# Altium PCB CSI2-NITROGEN_Rev01.PcbDoc
Units mm, origin at the board's own origin, x right, y up, seen from the top; angles counter-clockwise.
Board outline 51 x 29 mm, 4 copper layers (Layer1 Top, Layer2, Layer3, Layer4 Bottom), stack 1.45 mm thick; 29 components, 26 nets, 122 pads, 46 vias.
Unrouted connection lines stored in the file: 15.
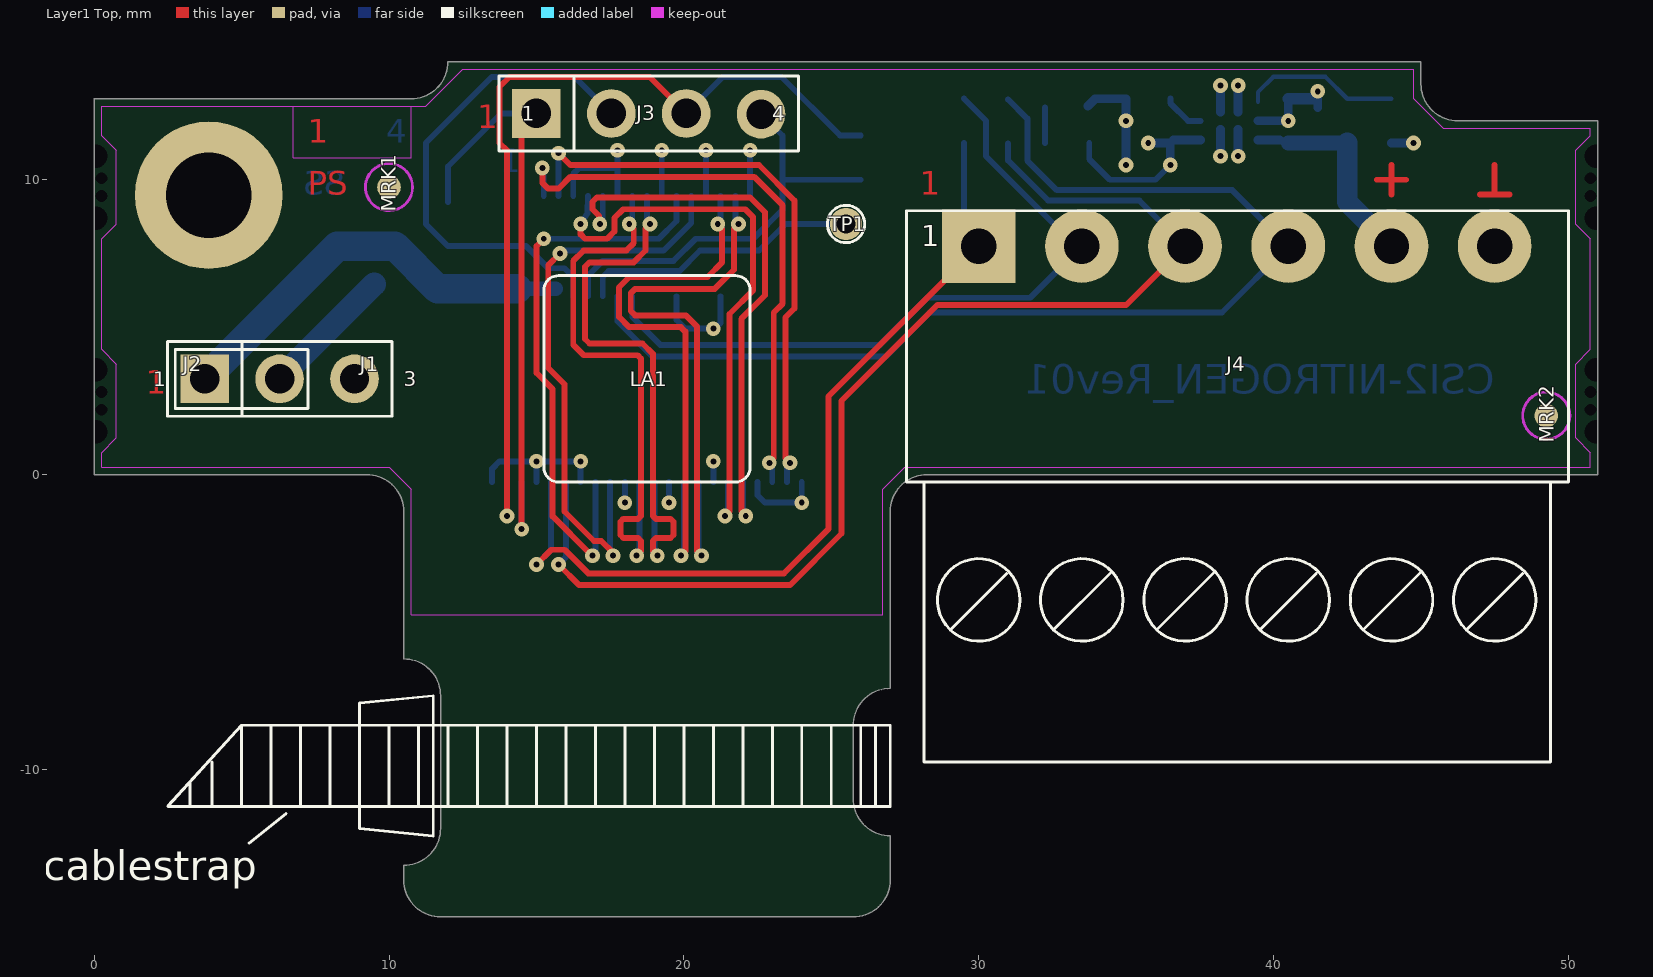
[diagram p0: Layer1 Top view]
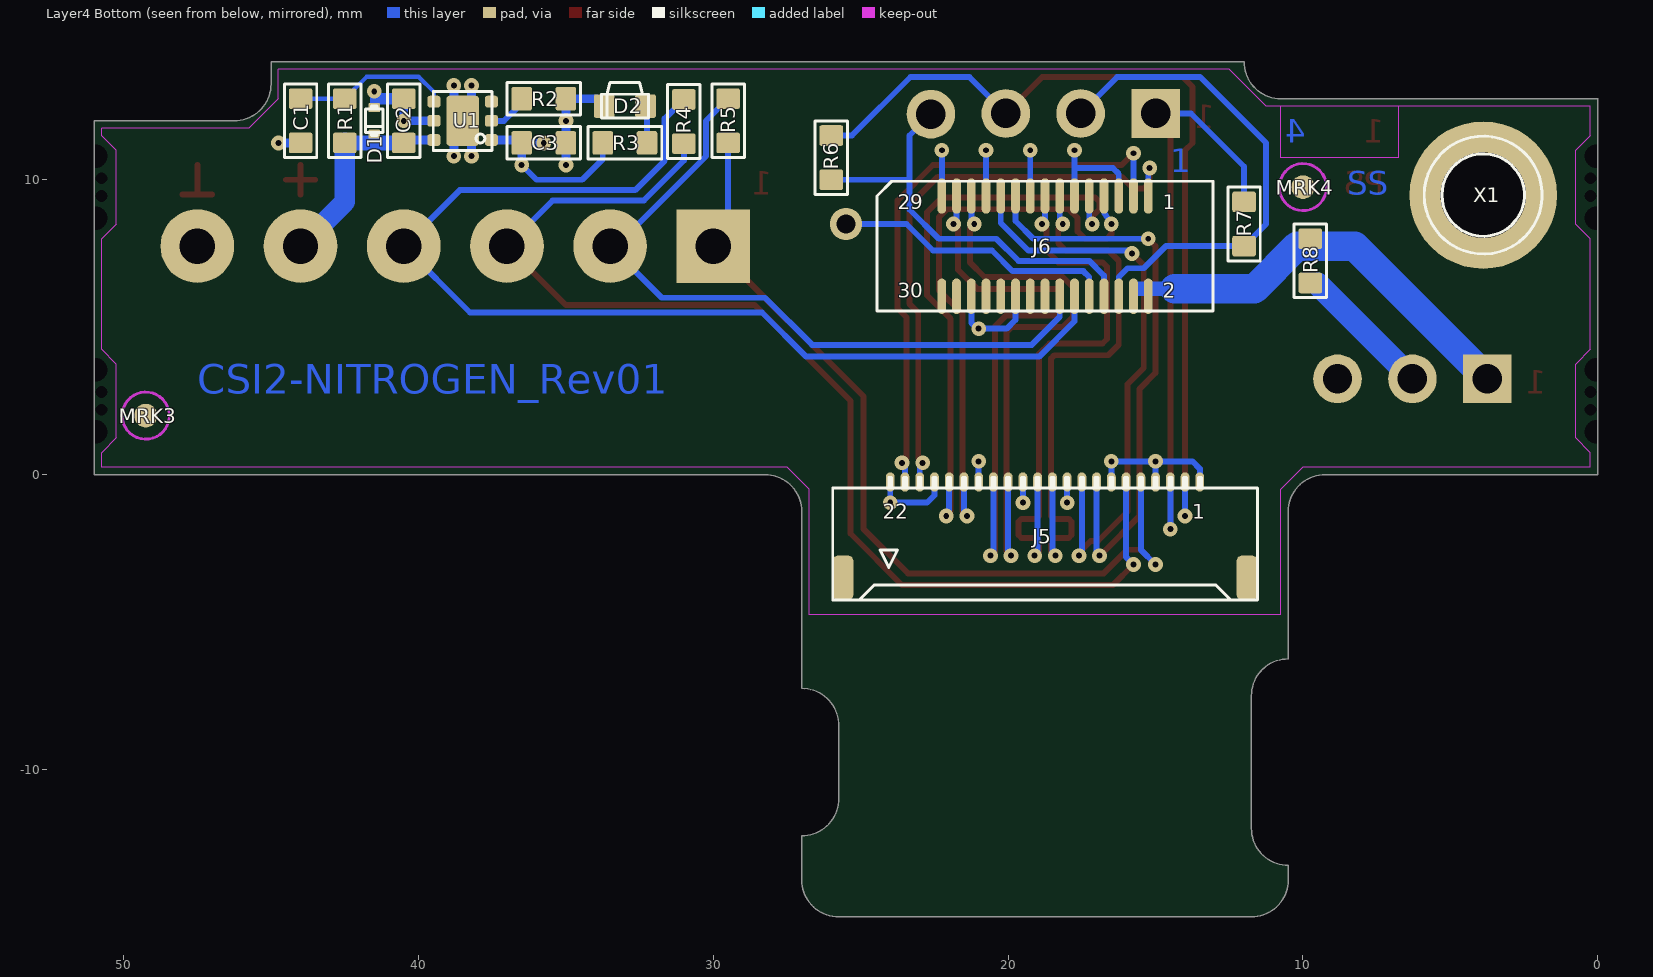
[diagram p1: Layer4 Bottom view, seen from below]
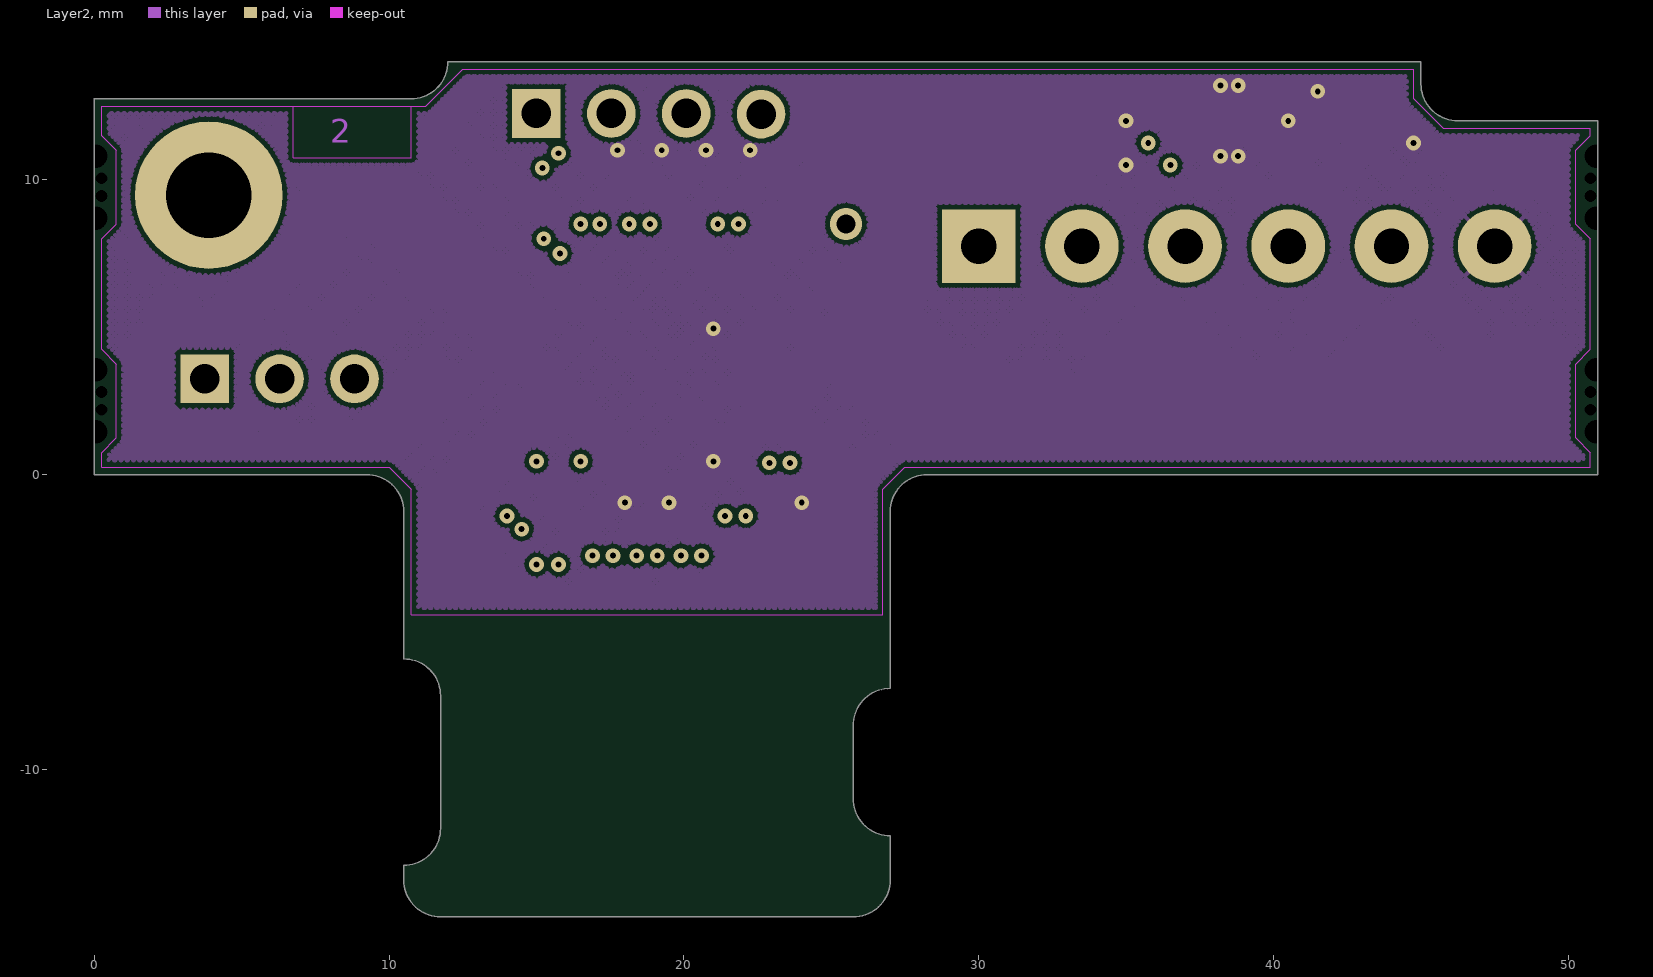
[diagram p2: Layer2]
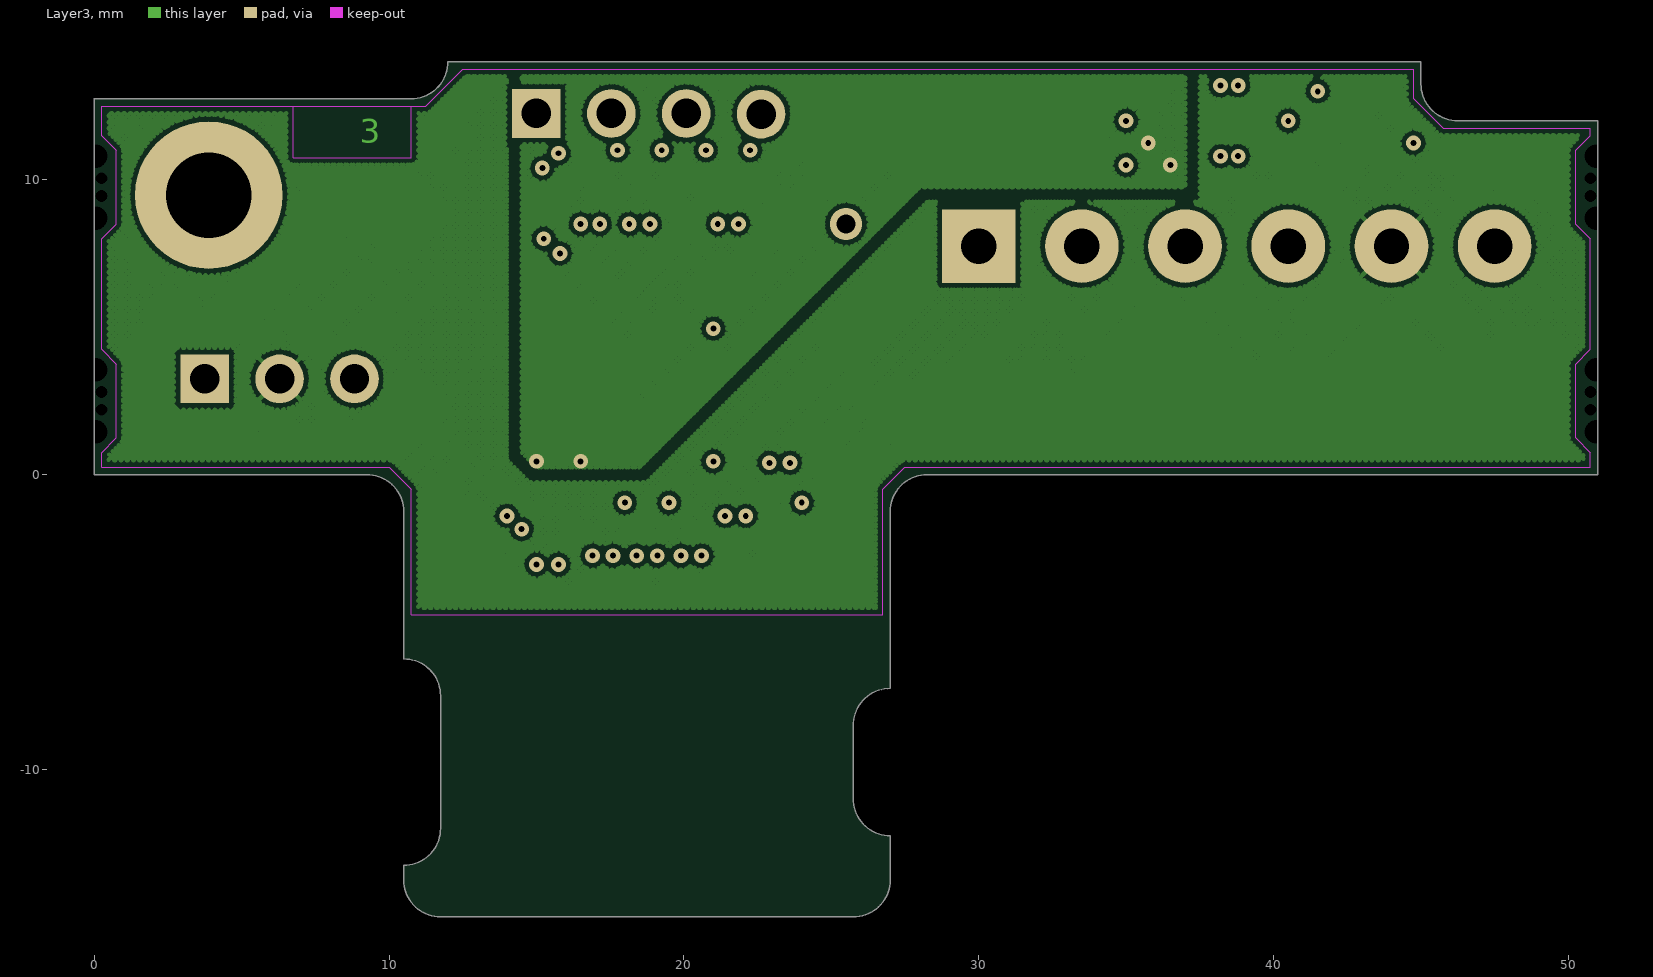
[diagram p3: Layer3]

## Layer stack, top to bottom
Top Solder: solder mask 0.025, Solder Resist, Dk 3.5
Layer1 Top: signal copper 0.035
Dielectric1: prepreg 0.3, FR-4, Dk 4.2
Layer2: signal copper 0.035
Dielectric2: core 0.71, FR-4, Dk 4.2
Layer3: signal copper 0.035
Dielectric3: prepreg 0.3, FR-4, Dk 4.2
Layer4 Bottom: signal copper 0.035
Bottom Solder: solder mask 0.025, Solder Resist, Dk 3.5

## Board outline
10.5,-13.75 10.5,-13.25 ccw(c10.5,-12) 11.75,-12 11.75,-7.5 ccw(c10.5,-7.5) 10.5,-6.25 10.5,-1.25 ccw(c9.25,-1.25) 9.25,0 0,0 0,12.75 10.75,12.75 ccw(c10.75,14) 12,14 45,14 45,13.25 ccw(c46.25,13.25) 46.25,12 51,12 51,0 28.25,0 ccw(c28.25,-1.25) 27,-1.25 27,-7.25 ccw(c27,-8.5) 25.75,-8.5 25.75,-11 ccw(c27,-11) 27,-12.25 27,-13.75 cw(c25.75,-13.75) 25.75,-15 11.75,-15 cw(c11.75,-13.75)

## Design rules (kind name [scope] priority, off if disabled: settings)
Clearance [All] p1: gap=0.15 ignorepadtopadclearanceinfootprint=FALSE except(0: Arc-Hole Track-Hole SMDPad-Hole THPad-Hole Via-Hole Fill-Hole Poly-Hole Region-Hole Text-Hole)
ComponentClearance [All] p1 off: gap=0.254 collisioncheckmode=3 verticalgap=0.254 showdistances=FALSE
DiffPairsRouting [All] p1: maxlimit=1 minlimit=0.2 mostfreqgap=0.2 toplayer_minwidth=0.15 toplayer_maxwidth=0.25 toplayer_prefwidth=0.25 midlayer1_minwidth=0.15 midlayer1_maxwidth=0.25 midlayer1_prefwidth=0.25 midlayer2_minwidth=0.15 midlayer2_maxwidth=0.25 midlayer2_prefwidth=0.25 bottomlayer_minwidth=0.15 bottomlayer_maxwidth=0.25 bottomlayer_prefwidth=0.25 maxuncoupledlength=12.7
FabricationTestPointUsage TestPointUsage [All] p1: valid=0 allowmultiple=FALSE
FabricationTestpoint Testpoint [All] p1: side=3 testpointundercomponent=TRUE minsize=1.016 maxsize=2.54 preferedsize=1.524 minholesize=0 maxholesize=1.016 preferedholesize=0.813 testpointgrid=0.025 allowsidetop=TRUE allowsidebottom=TRUE usegrid=TRUE gridtolerance=0
Height [All] p1 off: minheight=0 maxheight=25.4 prefheight=12.7
HoleSize [All] p1: absolutevalues=TRUE maxlimit=5 minlimit=0.025 maxpercent=80.000 minpercent=20.000
PlaneClearance [All] p1: clearance=0.3
PlaneConnect FreePads [(InPadClass('Free-Pads'))   or (isvia)] p1: planeconnectstyle=Direct reliefexpansion=0.508 reliefentries=4 reliefconductorwidth=0.254 reliefairgap=0.254
PlaneConnect [All] p2: planeconnectstyle=Relief reliefexpansion=0.2 reliefentries=4 reliefconductorwidth=0.2 reliefairgap=0.2
PolygonConnect VIA [isvia] p1: connectstyle=Direct reliefconductorwidth=0.2 reliefentries=4 polygonreliefangle="90 Angle" airgapwidth=0.254
PolygonConnect PolygonConnect_1 [All] p2: connectstyle=Relief reliefconductorwidth=0.15 reliefentries=4 polygonreliefangle="45 Angle" airgapwidth=0.15
RoutingVias [All] p1: holewidth=0.2 width=0.5 viastyle="Through Hole" minholewidth=0.2 minwidth=0.5 maxholewidth=0.2 maxwidth=0.5
SilkToSolderMaskClearance SilkscreenOverComponentPads [IsPad] p1: minsilkscreentomaskgap=0.254 clearancetoexposedcopper=TRUE
SolderMaskExpansion SolderMaskExpansion_VIA [(IsVia)] p1: expansion=-9
SolderMaskExpansion [All] p2: expansion=0.05
Width [All] p1: maxlimit=2 minlimit=0.1 preferedwidth=0.15
21 further rules are at their usual default settings.

## Classes and differential pairs
differential pair B7-CSI2-TXD3: +B7-CSI2-TXD3_P -B7-CSI2-TXD3_N
differential pair B7-CSI2-TXD2: +B7-CSI2-TXD2_P -B7-CSI2-TXD2_N
differential pair B7-CSI2-TXD1: +B7-CSI2-TXD1_P -B7-CSI2-TXD1_N
differential pair B7-CSI2-TXD0: +B7-CSI2-TXD0_P -B7-CSI2-TXD0_N
differential pair B7-CSI2-TXC: +B7-CSI2-TXC_P -B7-CSI2-TXC_N

## Components (designator, comment, footprint, x,y, rotation, side; value= is the part's Value field where it differs from the comment)
C1 "100n" C-0603_1.0 44,12 r270 bottom (schematic designator C2)
C2 "10u" C-0603_1.0 40.5,12 r90 bottom (schematic designator C1)
C3 "10u" C-0603_1.0 35.75,11.25 r180 bottom
D1 "ESD9B5.0ST5G" D-SOD923 41.5,12 r270 bottom (schematic designator D4)
D2 "Green" D-0603-SLED 33,12.5 r180 bottom (schematic designator D11)
J1 "CON1x3" "CON 1x3 RM2.54" 3.75,3.25 r0 top
J2 "Jumper" J-JUMPER-2.54 5,3.25 r180 top (schematic designator J10)
J3 "CON1x4" "CON 1x4 RM2.54" 15,12.25 r0 top locked
J4 "MC 1,5/6-G-3,5" "CON_MiniCon 6pol 3mm5" 30,7.75 r0 top locked
J5 "CON FFC22_Inverted" "J-FH55-22S-0.5SH - Inverted Pins" 18.75,-0.25 r180 bottom (schematic designator J2)
J6 "53748-0308" J-MOLEX-53748-0308 18.75,7.75 r180 bottom locked (schematic designator J5)
LA1 "LABEL 7x7mm" "PCB LABEL 7x7" 18.75,3.25 r0 top
MRK1 "Marker Single Layer" PCB_MARKER_PAD_TOP 10,9.75 r0 top
MRK2 "Marker Single Layer" PCB_MARKER_PAD_TOP 49.25,2 r0 top
MRK3 "Marker Single Layer" PCB_MARKER_PAD_TOP 49.25,2 r180 bottom
MRK4 "Marker Single Layer" PCB_MARKER_PAD_TOP 10,9.75 r180 bottom
R1 "11k" R-0603_0.6 42.5,12 r90 bottom (schematic designator R7)
R2 "11k" R-0603_0.6 35.75,12.75 r0 bottom (schematic designator R8)
R3 "1k0" R-0603_0.6 33,11.25 r180 bottom (schematic designator R6)
R4 "NL" R-0603_0.6 31,11.975 r90 bottom (schematic designator R5)
R5 "NL" R-0603_0.6 29.5,12 r90 bottom (schematic designator R4)
R6 "0R0" R-0603_0.6 26,10.75 r270 bottom (schematic designator R2)
R7 "0R0" R-0603_0.6 12,8.5 r270 bottom (schematic designator R3)
R8 "NL" R-0603_0.6 9.75,7.25 r270 bottom (schematic designator R1)
T1 "PCB Text TOP" "PCB TEXTFIELD TOP 2" 3.75,-43.25 r0 top locked
T2 "PCB Text BOT" "PCB TEXTFIELD BOT 2" 3.75,-43.25 r180 bottom locked
TP1 "TP" TP_11_065 25.5,8.5 r0 top
U1 "NCP380HMUAJAATBG" IC-DFN06_2.0x2.0x0.8 38.5,12 r90 bottom
X1 "PCB Spacer M2x3" X-HOLE-2.9-4.0-DK_AH_3.0 3.888,9.482 r180 bottom locked

## Footprints (in the part's own frame and the unit in brackets; to place one, negate y for a bottom-side part, rotate by r counter-clockwise, add the part's x,y. Pads: shape width x height; smd on the part's side, far side on the other; paste and mask are expansions set on the pad)
C-0603_1.0 [mm]
  rrect20% 0.7x0.8 smd: 1(-0.75,0) 2(0.75,0)
  silkscreen extent -1.25,-0.55 1.25,0.55, body extent -0.9,-0.5 0.9,0.5, height 0.99
"CON 1x3 RM2.54" [mm]
  rect 1.65x1.65 hole 1: 1(0,0)
  round 1.65 hole 1: 2(2.54,0) 3(5.08,0)
  silkscreen extent -1.27,-1.27 6.35,1.27
"CON 1x4 RM2.54" [mm] "RM2.54 Connector 1x4"
  rect 1.65x1.65 hole 1: 1(0,0)
  round 1.65 hole 1: 2(2.54,0) 3(5.08,0) 4(7.62,-0.025)
  silkscreen extent -1.27,-1.27 8.89,1.27
"CON_MiniCon 6pol 3mm5" [mm] "Phoenix MC 1,5/6-G-3,5 MiniCon 6polig 3,5mm"
  rect 2.5x2.5 hole 1.2: 1(0,0)
  round 2.5 hole 1.2: 2(3.5,0) 3(7,0) 4(10.5,0) 5(14,0) 6(17.5,0)
  silkscreen extent -2.45,-17.5 20,1.2, body extent -3.55,-8 21.05,1.2, height 7.27
D-0603-SLED [mm]
  rrect20% 0.7x0.8 smd: A(0.7,0) K(-0.7,0)
  silkscreen extent -0.8,-0.4 0.8,0.8, body extent -0.81,-0.3 0.81,0.8, height 0.81
D-SOD923 [mm]
  rrect20% 0.3x0.4 smd: A(-0.45,0) K(0.45,0)
  silkscreen extent -0.5,-0.3 0.5,0.3, body extent -0.4,-0.3 0.4,0.3, height 0.4
IC-DFN06_2.0x2.0x0.8 [mm]
  rrect50% 0.4x0.45 smd paste-0.02: 1(-0.65,-0.975) 2(0,-0.975) 3(0.65,-0.975) 4(0.65,0.975) 5(0,0.975) 6(-0.65,0.975)
  rrect20% 1.7x1.1 smd paste-9: 7(0,0)
  silkscreen extent -1,-1 1,1, body extent -1,-1 1,1, height 0.85
"J-FH55-22S-0.5SH - Inverted Pins" [mm]
  oval 0.3x0.65 smd: 1(5.25,0) 2(4.75,0) 3(4.25,0) 4(3.75,0) 5(3.25,0) 6(2.75,0) 7(2.25,0) 8(1.75,0) 9(1.25,0) 10(0.75,0) 11(0.25,0) 12(-0.25,0) 13(-0.75,0) 14(-1.25,0) 15(-1.75,0) 16(-2.25,0) 17(-2.75,0) 18(-3.25,0) 19(-3.75,0) 20(-4.25,0) 21(-4.75,0) 22(-5.25,0)
  rrect50% 0.7x1.5 smd: 23(-6.85,-3.25) 24(6.85,-3.25)
  silkscreen extent -7.2,-4 7.2,0.15, body extent -7.2,-4.05 7.2,0.2, height 1.46
J-JUMPER-2.54 [mm]
  silkscreen extent -2.25,-1 2.25,1, body extent -2.5,-1.25 2.5,1.25, height 9.5
J-MOLEX-53748-0308 [mm]
  oval 0.3x1.2 smd paste+0: 1(3.5,1.7) 2(3.5,-1.7) 3(3,1.7) 4(3,-1.7) 5(2.5,1.7) 6(2.5,-1.7) 7(2,1.7) 8(2,-1.7) 9(1.5,1.7) 10(1.5,-1.7) 11(1,1.7) 12(1,-1.7) 13(0.5,1.7) 14(0.5,-1.7) 15(0,1.7) 16(0,-1.7) 17(-0.5,1.7) 18(-0.5,-1.7) 19(-1,1.7) 20(-1,-1.7) 21(-1.5,1.7) 22(-1.5,-1.7) 23(-2,1.7) 24(-2,-1.7) 25(-2.5,1.7) 26(-2.5,-1.7) 27(-3,1.7) 28(-3,-1.7) 29(-3.5,1.7) 30(-3.5,-1.7)
  silkscreen extent -5.7,-2.2 5.7,2.2, body extent -5.65,-2.15 5.65,2.15, height 2.4
"PCB LABEL 7x7" [mm]
  silkscreen extent -3.5,-3.5 3.5,3.5, body extent -3.5,-3.5 3.5,3.5, height 0.1
"PCB TEXTFIELD BOT 2" [mm]
"PCB TEXTFIELD TOP 2" [mm]
PCB_MARKER_PAD_TOP [mm] "PCB Marker with Pad for X-/Y-Coordinates (Single Layer)"
  round 0.8 smd paste-999 mask+0.4: 1(0,0)
  Layer1 Top keep-out circle w0.1: c0,0 r0.8
R-0603_0.6 [mm]
  rrect20% 0.7x0.8 smd: 1(-0.75,0) 2(0.75,0)
  silkscreen extent -1.25,-0.55 1.25,0.55, body extent -0.85,-0.45 0.85,0.45, height 0.59
TP_11_065 [mm] "Testpoint: Pad=1,1mm; Hole=0,65mm"
  round 1.1 hole 0.65: 1(0,0)
  silkscreen extent -0.63,-0.63 0.64,0.63
X-HOLE-2.9-4.0-DK_AH_3.0 [mm]
  round 5 hole 2.9: 1(0,0)
  silkscreen extent -2,-2 2,2, body extent -2,-2 2,2, height 3

## Part data
C1: library part "C 100N 50V X7R 0603", "Capacitor Ceramic SMD/0603/50V/X7R/10%", Dielectric=X7R, KHK Part Number=K8340023, Manufacturer=several, Tolerance=10%, Voltage=50V, Manufacturer Part Number=several
C2 C3: library part "C 10U 10V X7T 0603 125°C", "Capacitor Ceramic SMD/0603/10V/X7T/20%/125°C", Dielectric=X7T, KHK Part Number=10509, Manufacturer=several, Tolerance=20%, Voltage=10V, Manufacturer Part Number=several
D1: library part "D ESD9B5.0ST5G", "DIODE TVS; 400W; 5.8-7.8V; BIDIRECT", KHK Part Number=7250, Manufacturer="ON Semiconductor", Manufacturer Part Number=ESD9B5.0ST5G
D2: library part "D Side LED 0603 green", "Side LED 0603 20mA green", Color=green, KHK Part Number=4248, Manufacturer=several, Manufacturer Part Number=several
J1: library part "CON 1x3 2.54", "Stiftleiste; 1x3; 2.54mm; gerade", KHK Part Number=K7600610, Manufacturer="fischer elektronik", Manufacturer Part Number="SL 11 124 3 G"
J2: library part "CON Jumper 2.54mm", "CON/JUMPER/STC02SYAN; 2-pin; 2.54mm; 3A; FEMALE; VERTICAL; BLACK", KHK Part Number=13444, Manufacturer=several, Manufacturer Part Number=several
J3: library part "CON 1x4 2.54", "Stiftleiste; 1x4; 2.54mm; gerade", KHK Part Number=K7600564, Manufacturer=Harwin, Manufacturer Part Number="M20-999 0445"
J4: library part "CON MiniCon 6pol 3mm5", "Phoenix MC 1,5/6-G-3,5 MiniCon 6polig 3,5mm", KHK Part Number=K7600569, Manufacturer=Phoenix, Manufacturer Part Number="MC 1,5/6-G-3,5"
J5: library part "CON FFC22_FH55-22S-0.5SH_Inverted", "FFC Connector 0.5mm shielded", KHK Part Number=10357, Manufacturer=Hirose, Manufacturer Part Number=FH55-22S-0.5SH
J6: library part "CON Molex 53748-0308", "30pin B2B plug 0.5 pitch 3mm Height", KHK Part Number=10287, Manufacturer=Molex, Manufacturer Part Number=53748-0308
LA1: library part "PCB LABEL 7x7", Manufacturer=several, Manufacturer Part Number=several
MRK1 MRK2 MRK3 MRK4: library part "PCB Marker Pad Single Layer", "Position Marker for PCBs"
R1 R2: library part "R 11K 1% 0603", "Standard Resistor SMD/0603/1%/100mW/TK100", KHK Part Number=K8250147, Manufacturer=several, Temperature Coefficient=TK100, Tolerance=1%, Manufacturer Part Number=several
R3: library part "R 1K0 1% 0603", "Standard Resistor SMD/0603/1%/100mW/TK100", KHK Part Number=K8250040, Manufacturer=several, Temperature Coefficient=TK100, Tolerance=1%, Manufacturer Part Number=several
R4 R5 R8: library part "R X 0603", "Standard Resistor SMD/0603/1%/100mW/TK100", Temperature Coefficient=TK100, Tolerance=1%
R6 R7: library part "R 0R0 1% 0603", "Standard Resistor SMD/0603/1%/100mW/TK100", KHK Part Number=K8250041, Manufacturer=several, Tolerance=1%, Manufacturer Part Number=several
T1: library part "PCB TEXT FIELD TOP", "PCB Textfield TOP"
T2: library part "PCB TEXT FIELD BOT", "PCB Textfield BOT"
TP1: library part TP_11_065, "Testpoint: Pad=1,1mm; Hole=0,65mm"
U1: library part "IC  NCP380HMUAJAATBG", "IC/PWR/LOADSW;1V2-5V5;3A;0R03/WLCSP6/1x1.5x0.63mm", KHK Part Number=13676, Manufacturer=onsemi, I max=2.1A, Manufacturer Part Number=NCP380HMUAJAATBG, Vin=2.5V-5.5V
X1: "Abstandsbuchse SMTSO-2,1-3 ET", KHK Part Number=3291, Manufacturer=KVT, Manufacturer Part Number="SMTSO-2,1-3 ET"

## Free pads (board coordinates)
  round 0 hole 0.8 unplated mask+0.5: 0(0.05,1.45) 0(0.05,3.55) 0(0.05,8.7) 0(0.05,10.8) 0(50.95,1.45) 0(50.95,3.55) 0(50.95,8.7) 0(50.95,10.8)
  round 0 hole 0.4 unplated mask+0.3: 0(0.25,2.2) 0(0.25,2.8) 0(0.25,9.45) 0(0.25,10.05) 0(50.75,2.2) 0(50.75,2.8) 0(50.75,9.45) 0(50.75,10.05)

## Via types
v1: diameter 0.5, hole 0.2, Layer1 Top to Layer4 Bottom, 46 vias

## Nets (pads, with @x,y where several pads share a name; then routed paths per layer and width w, separated by ;. In a path a pad name is that pad's centre, name@x,y a point inside that pad or via, vN(x,y) a via of type N, cw(c..) or ccw(c..) an arc to the next point about the centre after c; other vN are vias at no path point)
B7-CSI2-TXC_N: J5.14 J6.25 | length 19.9
  Layer1 Top w0.2: v1(19.9,-2.75) 20.05,-2.6 20.05,4.85 19.9,5 18.15,5 17.8,5.35 17.8,6.35 18.15,6.7 20.8,6.7 21.3,7.2 21.3,8.35 v1(21.15,8.5)
  Layer4 Bottom w0.2: v1(19.9,-2.75) 20,-2.65 J5.14 ; v1(21.15,8.5) 21.25,8.6 J6.25
B7-CSI2-TXC_P: J5.15 J6.27 | length 19.9
  Layer1 Top w0.2: v1(20.6,-2.75) 20.45,-2.6 20.45,5.016 20.066,5.4 18.35,5.4 18.2,5.55 18.2,6.15 18.35,6.3 21.05,6.3 21.7,6.95 21.7,8.35 v1(21.85,8.5)
  Layer4 Bottom w0.2: J5.15 20.5,-2.65 v1(20.6,-2.75) ; J6.27 21.75,8.6 v1(21.85,8.5)
B7-CSI2-TXD0_N: J5.20 J6.1 | length 19.9
  Layer1 Top w0.2: v1(15.2,10.4) 15.2,9.9 15.4,9.7 15.75,9.7 16.15,10.1 22.384,10.1 23.35,9.134 23.35,5.8 23.05,5.5 23.05,0.55 v1(22.9,0.4)
  Layer4 Bottom w0.2: v1(15.2,10.4) 15.25,10.35 J6.1 ; v1(22.9,0.4) 23,0.3 J5.20
B7-CSI2-TXD0_P: J5.21 J6.3 | length 19.9
  Layer1 Top w0.2: v1(15.75,10.9) 16.15,10.5 22.55,10.5 23.75,9.3 23.75,5.634 23.45,5.334 23.45,0.55 v1(23.6,0.4)
  Layer4 Bottom w0.2: J6.3 v1(15.75,10.9) ; J5.21 23.5,0.3 v1(23.6,0.4)
B7-CSI2-TXD1_N: J5.17 J6.7 | length 19.8
  Layer1 Top w0.2: v1(16.5,8.5) 16.5,8.15 16.65,8 17.4,8 17.65,8.25 17.65,8.707 17.943,9 22.084,9 22.35,8.734 22.35,6.25 21.55,5.45 21.55,-1.25 v1(21.4,-1.4)
  Layer4 Bottom w0.2: v1(16.5,8.5) 16.736,8.864 J6.7 ; v1(21.4,-1.4) 21.5,-1.3 J5.17
B7-CSI2-TXD1_P: J5.18 J6.9 | length 19.8
  Layer1 Top w0.2: v1@17.125,8.544 17.125,8.775 16.9,9 16.9,9.25 17.05,9.4 22.25,9.4 22.75,8.9 22.75,6.084 21.95,5.284 21.95,-1.25 v1(22.1,-1.4)
  Layer4 Bottom w0.2: v1(17.15,8.5) 17.25,8.6 J6.9 ; J5.18 22,-1.3 v1(22.1,-1.4)
B7-CSI2-TXD2_N: J5.11 J6.13 | length 19.8
  Layer1 Top w0.2: v1(18.15,8.5) 18.3,8.35 18.3,7.85 18.05,7.6 16.6,7.6 16.25,7.25 16.25,4.4 16.6,4.05 18.434,4.05 18.55,3.934 18.55,-1.4 18.45,-1.5 17.95,-1.5 17.85,-1.6 17.85,-2.05 17.95,-2.15 18.45,-2.15 18.55,-2.25 18.55,-2.6 v1(18.4,-2.75)
  Layer4 Bottom w0.2: v1(18.15,8.5) 18.25,8.6 J6.13 ; v1(18.4,-2.75) 18.5,-2.65 J5.11
B7-CSI2-TXD2_P: J5.12 J6.15 | length 19.8
  Layer1 Top w0.2: v1(18.85,8.5) 18.7,8.35 18.7,7.6 18.3,7.2 16.8,7.2 16.65,7.05 16.65,4.6 16.8,4.45 18.6,4.45 18.95,4.1 18.95,-1.4 19.05,-1.5 19.55,-1.5 19.65,-1.6 19.65,-2.05 19.55,-2.15 19.05,-2.15 18.95,-2.25 18.95,-2.6 v1(19.1,-2.75)
  Layer4 Bottom w0.2: J6.15 18.75,8.6 v1(18.85,8.5) ; J5.12 19,-2.65 v1(19.1,-2.75)
B7-CSI2-TXD3_N: J5.8 J6.19 | length 19.8
  Layer1 Top w0.2: v1(15.25,8) 15,7.75 15,3.45 15.55,2.9 15.55,-1.416 16.784,-2.65 16.8,-2.65 v1(16.9,-2.75)
  Layer4 Bottom w0.2: v1(15.25,8) 19.15,8 19.75,8.6 J6.19 ; v1(16.9,-2.75) 17,-2.65 J5.8
B7-CSI2-TXD3_P: J5.9 J6.21 | length 19.8
  Layer1 Top w0.2: v1(15.8,7.5) 15.4,7.1 15.4,3.616 15.95,3.066 15.95,-0.55 15.95,-1.25 16.95,-2.25 17.2,-2.25 17.604,-2.654 v1@17.604,-2.746
  Layer4 Bottom w0.2: v1(15.8,7.5) 15.9,7.6 19.316,7.6 20.25,8.534 J6.21 ; J5.9 17.5,-2.65 v1(17.6,-2.75)
EXT-GPIO0-I2C-SCL: J3.3 J5.2 R6.1 | length 30
  Layer1 Top w0.2: v1(14,-1.4) 14,11 13.75,11.25 13.75,13.15 14.088,13.488 18.842,13.488 J3.3
  Layer4 Bottom w0.2: v1(14,-1.4) J5.2 ; J3.3 21.318,13.488 23.312,13.488 25.3,11.5 R6.1
EXT-GPIO1-I2C-SDA: J3.1 J5.3 R7.1 | length 20.9
  Layer1 Top w0.2: v1(14.5,-1.85) 14.5,11.75 J3.1
  Layer4 Bottom w0.2: R7.1 12,10.45 13.8,12.25 J3.1 ; v1(14.5,-1.85) J5.3
EXT-GPIO2: J4.1 J5.5 R5.1 | length 28.8
  Layer1 Top w0.2: v1(15,-3.05) 15.5,-2.55 15.957,-2.55 16.757,-3.35 23.4,-3.35 24.9,-1.85 24.9,2.65 J4.1
  Layer4 Bottom w0.2: v1(15,-3.05) 15.5,-2.55 J5.5 ; J4.1@29.5,8.25 R5.1
EXT-GPIO3: J4.3 J5.6 R4.1 | length 39.6
  Layer1 Top w0.2: v1(15.75,-3.05) 16.45,-3.75 23.6,-3.75 25.35,-2 25.35,2.5 28.6,5.75 35,5.75 J4.3
  Layer4 Bottom w0.2: v1(15.75,-3.05) 16,-2.8 J5.6 ; R4.1 31,10.655 32.355,9.3 35.45,9.3 J4.3
GND: C1.2 C2.2 C3.2 D1.A D2.K J4.6 J5.10 J5.13 J5.16 J5.19 J5.22 J6.5 J6.11 J6.17 J6.20 J6.23 J6.26 J6.29 R2.1 U1.5 U1.7 | length 28.1
  Layer4 Bottom w0.2: J6.5 16.25,10.2 16.45,10.4 17.75,10.4 ; J6.11 17.75,10.4 ; v1(17.75,11) 17.75,10.4 ; v1(18,-0.95) J5.10 ; J6.17 v1(19.25,11) ; v1(19.5,-0.95) J5.13 ; J6.20 19.75,5.25 20.05,4.95 20.95,4.95 21,4.9 21.25,5.15 J6.26 ; J6.23 v1(20.75,11) ; J5.16 v1(21,0.45) ; J6.29 v1(22.25,11) ; J5.19 22.5,-0.7 22.75,-0.95 v1(24,-0.95) J5.22
  Layer4 Bottom w0.3: D2.K 33.95,12.75 R2.1 v1(35,12) v1(35,10.5) ; v1(38.2,10.8) U1.7@38.2,11.7 ; U1.7@38.2,12.3 v1(38.2,13.2) ; v1(38.8,10.8) U1.7@38.8,11.7 ; U1.7@38.8,12.3 v1(38.8,13.2) ; U1.5 v1(40.5,12) C2.2 ; D1.A v1(41.5,13) ; C1.2 v1(44.75,11.25)
  Layer4 Bottom w0.4: C2.2 41.45,12.75
  other v1: 21,4.95
I2C2_SCL: J3.4 J6.8 R6.2 | length 14.4
  Layer4 Bottom w0.2: J6.8 16.75,6.75 17.25,7.25 19.65,7.25 20.4,8 22.35,8 23.345,8.995 23.345,11.5 J3.4 ; 23.345,10 R6.2
I2C2_SDA: J3.2 J6.6 R7.2 | length 16.9
  Layer4 Bottom w0.2: J6.6 16.25,6.705 15.955,7 15.4,7 14.65,7.75 R7.2 11.25,8.5 11.25,11.25 13.487,13.488 16.302,13.488 J3.2
MIPI_BAKLGT_ON: J4.4 J6.12 R4.2 | length 38
  Layer4 Bottom w0.2: J6.12 17.75,5.2 18.95,4 26.85,4 28.35,5.5 38.25,5.5 J4.4 38.6,9.65 32.65,9.65 31.65,10.65 31.65,12.075 R4.2
NANDF_D5: J4.2 J6.14 R5.2 | length 24.5
  Layer4 Bottom w0.2: J6.14 18.25,5.35 19.2,4.4 26.65,4.4 28.25,6 31.75,6 J4.2 33.3,7.75 30.25,10.8 30.25,12 R5.2
NetC1_1: C1.1 R1.2 U1.4 | length 5.4
  Layer4 Bottom w0.15: U1.4 39.475,12.975 39.988,13.488 41.762,13.488 R1.2 C1.1
NetC3_1: C3.1 J5.1 J5.4 J5.7 R3.1 U1.1 | length 11.1
  Layer4 Bottom w0.2: J5.1 13.5,0.2 13.75,0.45 v1(16.5,0.45) J5.7 ; J5.4 v1@15,0.4 ; R3.1 33.75,10.7 34.45,10 36,10 v1(36.5,10.5)
  Layer4 Bottom w0.3: v1(35.75,11.25) C3.1 v1(36.5,10.5) ; C3.1@36.6,11.35 U1.1
  other v1: 15,0.45
NetD2_A: D2.A R3.2 | length 1.2
  Layer4 Bottom w0.2: R3.2 D2.A@32.25,12.45
NetR2_2: R2.2 U1.2 | length 1.4
  Layer4 Bottom w0.2: R2.2 36.5,12.6 37.1,12 U1.2
PWM3: J6.10 TP1.1 | length 9.6
  Layer4 Bottom w0.2: J6.10 17.25,6.7 17.45,6.9 19.85,6.9 20.55,7.6 22.55,7.6 23.45,8.5 TP1.1
VCC5V0: J1.1 J6.2 J6.4 R8.1 | length 14.4
  Layer4 Bottom w0.5: 14.35,6.3 J6.4@15.65,6.3
  Layer4 Bottom w1: J1.1 8.25,7.75 10.2,7.75 11.65,6.3 14.35,6.3
VCC-EXT-IN: C2.1 D1.K J1.2 J4.5 R1.1 R8.2 U1.6 | length 11.4
  Layer4 Bottom w0.3: U1.6 C2.1@40.206,11.35
  Layer4 Bottom w0.5: C2.1 R1.1
  Layer4 Bottom w0.7: R1.1 42.5,9.25 J4.5
  Layer4 Bottom w0.8: J1.2 R8.2@9.495,6.455
pads on no net: J1.3 J5.23 J5.24 J6.16 J6.18 J6.22 J6.24 J6.28 J6.30 MRK1.1 MRK2.1 MRK3.1 MRK4.1 U1.3 X1.1
copper on no net: | length 4
  Layer1 Top w0.2: 43.5,10 44.5,10 ; 44,9.5 44,10.5 ; 47,9.5 48,9.5 ; 47.5,9.5 47.5,10.5

## Polygon pours and split planes (outlines as drawn)
NetC3_1 on Layer3 "NETC3_1_L03_P002" (hatched 45Degree grid 0.15 track 0.15, remove dead copper, pour order 2): 14.5,0.75 15,0.25 18.5,0.25 28,9.75 37,9.75 37,14 14.5,14
VCC-EXT-IN on Layer3 "VCC-EXT-IN_L03_P004" (hatched 45Degree grid 0.15 track 0.15, remove dead copper, pour order 4): 37.5,9.25 37.5,14 51,14 51,9.25 51,-10.5 0,-10.5 0,0.05 0,14 14,14 14,0.5 14.75,-0.25 18.75,-0.25 28.25,9.25
GND on Layer2 "GND_L02_P000" (hatched 45Degree grid 0.15 track 0.15, remove dead copper, pour order 0): 0,-10.5 0,14 51,14 51,-10.5

## Keep-outs
Keep-Out Layer:
  lines w0.025: 6.75,12.5 6.75,10.75 10.75,10.75 10.75,12.5 ; 0.25,0.25 10,0.25 10.75,-0.5 10.75,-4.75 26.75,-4.75 26.75,-0.5 27.5,0.25 50.75,0.25 50.75,0.75 50.25,1.25 50.25,3.75 50.75,4.25 50.75,8 50.25,8.5 50.25,11 50.75,11.5 50.75,11.75 45.75,11.75 44.75,12.75 44.75,13 44.75,13.75 12.5,13.75 11.25,12.5 0.25,12.5 0.25,11.5 0.75,11 0.75,8.5 0.25,8 0.25,4.25 0.75,3.75 0.75,1.25 0.25,0.75 0.25,0.25

## Other copper
Layer1 Top:
  text "1" at 13,11.75 h0.8
  text "1" at 7.25,11.25 h0.8
  text "PS" at 7.25,9.5 h0.8
  text "1" at 28,9.5 h0.8
  text "1" at 1.75,2.75 h0.8
Layer2:
  text "2" at 8,11.25 h0.8
  text "Layer 2" at 36.75,-51.25 h0.9
Layer3:
  text "3" at 9,11.25 h0.8
  text "Layer 3" at 36.75,-51.25 h0.9
Layer4 Bottom:
  text "4" at 9.9,11.25 h0.8
  text "1" at 14.5,10.25 h0.8
  text "SS" at 8.5,9.5 h0.8
  text "CSI2-NITROGEN_Rev01" at 47.5,2.75 h1

## Silkscreen, mask and mechanical layers (free items; w line width, h text height)
Top Overlay:
  lines w0.1: 3.25,-11.25 3.25,-10.425 ; 4,-11.25 4,-9.75 ; 5,-11.25 5,-8.5 ; 5.25,-12.5 6.5,-11.5 ; 6,-11.25 6,-8.5 ; 7,-11.25 7,-8.5 ; 8,-11.25 8,-8.5 ; 9,-11.25 9,-8.5 ; 10,-11.25 10,-8.5 ; 11,-11.25 11,-8.5 ; 12,-11.25 12,-8.5 ; 13,-11.25 13,-8.5 ; 14,-11.25 14,-8.5 ; 15,-11.25 15,-8.5 ; 16,-11.25 16,-8.5 ; 17,-11.25 17,-8.5 ; 18,-11.25 18,-8.5 ; 19,-11.25 19,-8.5 ; 20,-11.25 20,-8.5 ; 21,-11.25 21,-8.5 ; 22,-11.25 22,-8.5 ; 23,-11.25 23,-8.5 ; 24,-11.25 24,-8.5 ; 25,-11.25 25,-8.5 ; 26,-11.25 26,-8.5 ; 26.5,-11.25 26.5,-8.5 ; 5,-8.5 2.5,-11.25 27,-11.25 27,-8.5 5,-8.5 ; 9,-12 9,-7.75 11.5,-7.5 11.5,-12.25 9,-12
  text "cablestrap" at -1.75,-13.75 h1
Top Solder:
  lines w0.25: 43.5,10 44.5,10 ; 44,9.5 44,10.5 ; 47,9.5 48,9.5 ; 47.5,9.5 47.5,10.5
  text "1" at 13,11.75 h0.8
  text "1" at 28,9.5 h0.8
  text "1" at 1.75,2.75 h0.8
Bottom Solder:
  text "1" at 14.5,10.25 h0.8
  text "CSI2-NITROGEN_Rev01" at 47.5,2.75 h1
Mechanical 1:
  lines w0.025: 46.25,12 cw(c46.25,13.25) 45,13.25 45,14 12,14 cw(c10.75,14) 10.75,12.75 0,12.75 0,0 9.25,0 cw(c9.25,-1.25) 10.5,-1.25 10.5,-6.25 cw(c10.5,-7.5) 11.75,-7.5 11.75,-12 cw(c10.5,-12) 10.5,-13.25 10.5,-13.75 ccw(c11.75,-13.75) 11.75,-15 25.75,-15 ccw(c25.75,-13.75) 27,-13.75 27,-12.25 cw(c27,-11) 25.75,-11 25.75,-8.5 cw(c27,-8.5) 27,-7.25 27,-1.25 cw(c28.25,-1.25) 28.25,0 51,0 51,12 46.264,12
Drill Drawing:
  circle w0.1: c-45.794,-37.096 r0.417
  lines w0.1: -46.95,-38.075 82.143,-38.075 ; -46.95,-24.95 82.143,-24.95 ; -45.25,22.75 -10.25,22.75 ; -45.25,24.25 -10.25,24.25 ; -45.25,25.75 -10.25,25.75 ; -45.25,27.25 -10.25,27.25 ; -45.25,28.75 -10.25,28.75 ; -45.25,30.25 -10.25,30.25 ; -45.25,31.75 -10.25,31.75 ; -45.25,33.25 -10.25,33.25 ; -40.144,-39.95 -40.144,-23.075 ; -31.501,-39.95 -31.501,-23.075 ; -30.25,19.25 -30.25,20.75 ; -30.25,21.25 -30.25,34.75 ; -23.25,19.25 -23.25,20.75 ; -23.25,21.25 -23.25,34.75 ; -14.761,-39.95 -14.761,-23.075 ; -8.518,-39.95 -8.518,-23.075 ; 0.575,-39.95 0.575,-23.075 ; 20.769,-39.95 20.769,-23.075 ; 37.359,-39.95 37.359,-23.075 ; 53.949,-39.95 53.949,-23.075 ; 64.691,-39.95 64.691,-23.075 ; -46.95,-39.95 82.143,-39.95 82.143,-23.075 -46.95,-23.075 -46.95,-39.95 ; -46.21,-35.637 -45.377,-35.637 -45.377,-34.804 -46.21,-34.804 -46.21,-35.637 ; -46.21,-33.762 -45.794,-33.554 -45.377,-33.762 -45.585,-33.346 -45.377,-32.929 -45.794,-33.137 -46.21,-32.929 -46.002,-33.346 -46.21,-33.762 ; -46.21,-31.679 -46.002,-31.679 -45.794,-31.887 -45.585,-31.679 -45.377,-31.679 -45.585,-31.471 -45.377,-31.262 -45.585,-31.262 -45.794,-31.054 -46.002,-31.262 -46.21,-31.262 -46.002,-31.471 -46.21,-31.679 ; -46.21,-29.179 -45.377,-29.179 -45.794,-30.012 -46.21,-29.179 ; -46.21,-27.929 -46.002,-27.929 -45.794,-28.137 -45.585,-27.929 -45.377,-27.929 -45.585,-27.721 -45.377,-27.512 -45.585,-27.512 -45.794,-27.304 -46.002,-27.512 -46.21,-27.512 -46.002,-27.721 -46.21,-27.929 ; -46.044,-33.596 -45.794,-33.471 -45.544,-33.596 -45.669,-33.346 -45.544,-33.096 -45.794,-33.221 -46.044,-33.096 -45.919,-33.346 -46.044,-33.596 ; -46.044,-31.596 -45.919,-31.596 -45.794,-31.721 -45.669,-31.596 -45.544,-31.596 -45.669,-31.471 -45.544,-31.346 -45.669,-31.346 -45.794,-31.221 -45.919,-31.346 -46.044,-31.346 -45.919,-31.471 -46.044,-31.596 ; -45.25,19.25 -45.25,20.75 -10.25,20.75 -10.25,19.25 -45.25,19.25 ; -45.25,21.25 -10.25,21.25 -10.25,34.75 -45.25,34.75 -45.25,21.25 ; -45.25,35.25 -10.25,35.25 -10.25,36.75 -45.25,36.75 -45.25,35.25
  text "Layer Stackup 4  FR4" at -44.25,35.75 h0.8
  text "Top Soldermask" at -44.25,33.75 h0.8
  text "25 um" at -27.75,33.75 h0.8
  text "standard" at -22.25,33.75 h0.8
  text "Layer1 Top" at -44,32.25 h0.8
  text "35 um" at -27.75,32.25 h0.8
  text "Signal" at -22.25,32.25 h0.8
  text "Prepreg" at -44,30.75 h0.8
  text "300 um" at -28.5,30.75 h0.8
  text "Layer2" at -44,29.25 h0.8
  text "35 um" at -27.75,29.25 h0.8
  text "Plane" at -22.25,29.25 h0.8
  text "Core" at -44,27.75 h0.8
  text "710 um" at -28.5,27.75 h0.8
  text "Layer3" at -44,26.25 h0.8
  text "35 um" at -27.75,26.25 h0.8
  text "Plane" at -22.25,26.25 h0.8
  text "Prepreg" at -44,24.75 h0.8
  text "300 um" at -28.5,24.75 h0.8
  text "Layer4 Bottom" at -44,23.25 h0.8
  text "35 um" at -27.75,23.25 h0.8
  text "Plane" at -22.25,23.25 h0.8
  text "Bottom Soldermask" at -44,21.75 h0.8
  text "25 um" at -27.75,21.75 h0.8
  text "standard" at -22.25,21.75 h0.8
  text "Thickness approx." at -44.25,19.75 h0.8
  text "1500 um" at -29.25,19.75 h0.8
  text "Symbol" at -45.825,-24.387 h0.9
  text "Hit Count" at -39.582,-24.387 h0.9
  text "Finished Hole Size" at -30.939,-24.387 h0.9
  text "Plated" at -14.199,-24.387 h0.9
  text "Hole Type" at -7.955,-24.387 h0.9
  text "Drill Layer Pair" at 1.137,-24.387 h0.9
  text "Hole Tolerance (+)" at 21.331,-24.387 h0.9
  text "Hole Tolerance (-)" at 37.921,-24.387 h0.9
  text "Hole Length" at 54.511,-24.387 h0.9
  text "Routed Path Length" at 65.253,-24.387 h0.9
  text "46" at -39.582,-26.262 h0.75
  text "0,200mm (7,87mil)" at -30.939,-26.262 h0.75
  text "PTH" at -14.199,-26.262 h0.75
  text "Round" at -7.955,-26.262 h0.75
  text "Layer1 Top - Layer4 Bottom" at 1.137,-26.262 h0.75
  text "-" at 54.511,-26.262 h0.75
  text "-" at 65.253,-26.262 h0.75
  text "E" at -46.171,-26.362 h0.83
  text "8" at -39.582,-28.137 h0.75
  text "0,400mm (15,75mil)" at -30.939,-28.137 h0.75
  text "NPTH" at -14.199,-28.137 h0.75
  text "Round" at -7.955,-28.137 h0.75
  text "Layer1 Top - Layer4 Bottom" at 1.137,-28.137 h0.75
  text "-" at 54.511,-28.137 h0.75
  text "-" at 65.253,-28.137 h0.75
  text "1" at -39.582,-30.012 h0.75
  text "0,650mm (25,59mil)" at -30.939,-30.012 h0.75
  text "PTH" at -14.199,-30.012 h0.75
  text "Round" at -7.955,-30.012 h0.75
  text "Layer1 Top - Layer4 Bottom" at 1.137,-30.012 h0.75
  text "-" at 54.511,-30.012 h0.75
  text "-" at 65.253,-30.012 h0.75
  text "8" at -39.582,-31.887 h0.75
  text "0,800mm (31,50mil)" at -30.939,-31.887 h0.75
  text "NPTH" at -14.199,-31.887 h0.75
  text "Round" at -7.955,-31.887 h0.75
  text "Layer1 Top - Layer4 Bottom" at 1.137,-31.887 h0.75
  text "-" at 54.511,-31.887 h0.75
  text "-" at 65.253,-31.887 h0.75
  text "7" at -39.582,-33.762 h0.75
  text "1,000mm (39,37mil)" at -30.939,-33.762 h0.75
  text "PTH" at -14.199,-33.762 h0.75
  text "Round" at -7.955,-33.762 h0.75
  text "Layer1 Top - Layer4 Bottom" at 1.137,-33.762 h0.75
  text "-" at 54.511,-33.762 h0.75
  text "-" at 65.253,-33.762 h0.75
  text "6" at -39.582,-35.637 h0.75
  text "1,200mm (47,24mil)" at -30.939,-35.637 h0.75
  text "PTH" at -14.199,-35.637 h0.75
  text "Round" at -7.955,-35.637 h0.75
  text "Layer1 Top - Layer4 Bottom" at 1.137,-35.637 h0.75
  text "-" at 54.511,-35.637 h0.75
  text "-" at 65.253,-35.637 h0.75
  text "1" at -39.582,-37.512 h0.75
  text "2,900mm (114,17mil)" at -30.939,-37.512 h0.75
  text "PTH" at -14.199,-37.512 h0.75
  text "Round" at -7.955,-37.512 h0.75
  text "Layer1 Top - Layer4 Bottom" at 1.137,-37.512 h0.75
  text "-" at 54.511,-37.512 h0.75
  text "-" at 65.253,-37.512 h0.75
  text "77 Total" at -39.582,-39.387 h0.75

## Dimensions
0,12.75 to 51,12 on Drill Drawing
45,14 to 25.75,-15 on Drill Drawing

## Text inside footprints (layer, text, board x,y; h text height)
J1: Top Overlay "3" at 10.5,3 h0.5; Top Overlay "1" at 2,2.99 h0.5
J3: Top Overlay "1" at 14.5,12 h0.5; Top Overlay "4" at 23,12 h0.5
J4: Top Overlay "1" at 28.05,7.75 h0.7
J5: Bottom Overlay "22" at 24.25,-1.5 h0.5; Bottom Overlay "1" at 13.75,-1.5 h0.5
J6: Bottom Overlay "1" at 14.75,9 h0.5; Bottom Overlay "2" at 14.75,6 h0.5; Bottom Overlay "30" at 23.75,6 h0.5; Bottom Overlay "29" at 23.75,9 h0.5
T1: Drill Drawing "All drills (PTH and NPTH) should run in one work process" at -47.25,-56.25 h0.8; Mechanical 16 "Project:" at 4.75,-49.25 h0.89; Mechanical 16 "Layer Name:" at 36.75,-49.25 h0.89; Mechanical 16 "Germany" at 52,-45 h0.89; Mechanical 16 "Stadtroda" at 39.5,-46.75 h0.89; Mechanical 16 "Taschenweg 2a" at 39.25,-45 h0.89; Mechanical 16 "Allied Vision" at 30,-45 h0.89; Mechanical 16 "Date:" at 4.75,-53.75 h0.89; Mechanical 16 "Title:" at 4.75,-44.75 h0.89; Mechanical 16 "PCB Designer:" at 20.75,-49.25 h0.89; Mechanical 16 "File Name:" at 20.75,-53.75 h0.89; Mechanical 16 "Technologies" at 30,-46.5 h0.89; Mechanical 16 "Bare Board Number:" at 59.75,-49.25 h0.89; Mechanical 16 "Bare Board Revision:" at 59.75,-44.75 h0.89; Mechanical 16 "2" at -21,-57.75 h0.5; Mechanical 16 "3" at -1,-57.75 h0.5; Mechanical 16 "4" at 19,-57.75 h0.5; Mechanical 16 "5" at 39,-57.75 h0.5; Mechanical 16 "6" at 59,-57.75 h0.5; Mechanical 16 "7" at 79,-57.75 h0.5; Mechanical 16 "1" at -41,-57.75 h0.5; Mechanical 16 "1" at -41,41.25 h0.5; Mechanical 16 "7" at 79,41.25 h0.5; Mechanical 16 "6" at 59,41.25 h0.5; Mechanical 16 "5" at 39,41.25 h0.5; Mechanical 16 "4" at 19,41.25 h0.5; Mechanical 16 "3" at -1,41.25 h0.5; Mechanical 16 "2" at -21,41.25 h0.5; Mechanical 16 "A" at -50.367,31.7 h0.5; Mechanical 16 "B" at -50.367,11.7 h0.5; Mechanical 16 "C" at -50.367,-8.3 h0.5; Mechanical 16 "D" at -50.367,-28.3 h0.5; Mechanical 16 "E" at -50.367,-48.3 h0.5; Mechanical 16 "E" at 88.633,-48.3 h0.5; Mechanical 16 "D" at 88.633,-28.3 h0.5; Mechanical 16 "C" at 88.633,-8.3 h0.5; Mechanical 16 "B" at 88.633,11.7 h0.5; Mechanical 16 "A" at 88.633,31.7 h0.5
T2: Mechanical 15 "Bare Board Revision:" at 32.25,-44.75 h0.89; Mechanical 15 "Bare Board Number:" at 32.25,-49.25 h0.89; Mechanical 15 "Technologies" at 62,-46.5 h0.89; Mechanical 15 "File Name:" at 71.25,-53.75 h0.89; Mechanical 15 "PCB Designer:" at 71.25,-49.25 h0.89; Mechanical 15 "Title:" at 87.25,-44.75 h0.89; Mechanical 15 "Date:" at 87.25,-53.75 h0.89; Mechanical 15 "Allied Vision" at 62,-45 h0.89; Mechanical 15 "Taschenweg 2a" at 52.75,-45 h0.89; Mechanical 15 "Stadtroda" at 52.5,-46.75 h0.89; Mechanical 15 "Germany" at 40,-45 h0.89; Mechanical 15 "Layer Name:" at 55.25,-49.25 h0.89; Mechanical 15 "A" at -50.133,31.7 h0.5; Mechanical 15 "B" at -50.133,11.7 h0.5; Mechanical 15 "C" at -50.133,-8.3 h0.5; Mechanical 15 "D" at -50.133,-28.3 h0.5; Mechanical 15 "E" at -50.133,-48.3 h0.5; Mechanical 15 "E" at 88.867,-48.3 h0.5; Mechanical 15 "D" at 88.867,-28.3 h0.5; Mechanical 15 "C" at 88.867,-8.3 h0.5; Mechanical 15 "B" at 88.867,11.7 h0.5; Mechanical 15 "A" at 88.867,31.7 h0.5; Mechanical 15 "2" at 59.5,41.25 h0.5; Mechanical 15 "3" at 39.5,41.25 h0.5; Mechanical 15 "4" at 19.5,41.25 h0.5; Mechanical 15 "5" at -0.5,41.25 h0.5; Mechanical 15 "6" at -20.5,41.25 h0.5; Mechanical 15 "7" at -40.5,41.25 h0.5; Mechanical 15 "1" at 79.5,41.25 h0.5; Mechanical 15 "1" at 79.5,-57.75 h0.5; Mechanical 15 "7" at -40.5,-57.75 h0.5; Mechanical 15 "6" at -20.5,-57.75 h0.5; Mechanical 15 "5" at -0.5,-57.75 h0.5; Mechanical 15 "4" at 19.5,-57.75 h0.5; Mechanical 15 "3" at 39.5,-57.75 h0.5; Mechanical 15 "2" at 59.5,-57.75 h0.5; Mechanical 15 "Project:" at 87.25,-49.25 h0.89